# Altium PCB PCB1.PcbDoc (part 4 of 9)
Units mm, origin at the board's own origin, x right, y up, seen from the top; angles counter-clockwise.
Board outline 227 x 102 mm, 4 copper layers (Top Layer, MidLayer1, MidLayer2, Bottom Layer); 425 components, 426 nets, 1455 pads, 440 vias.
Unrouted connection lines stored in the file: 2.
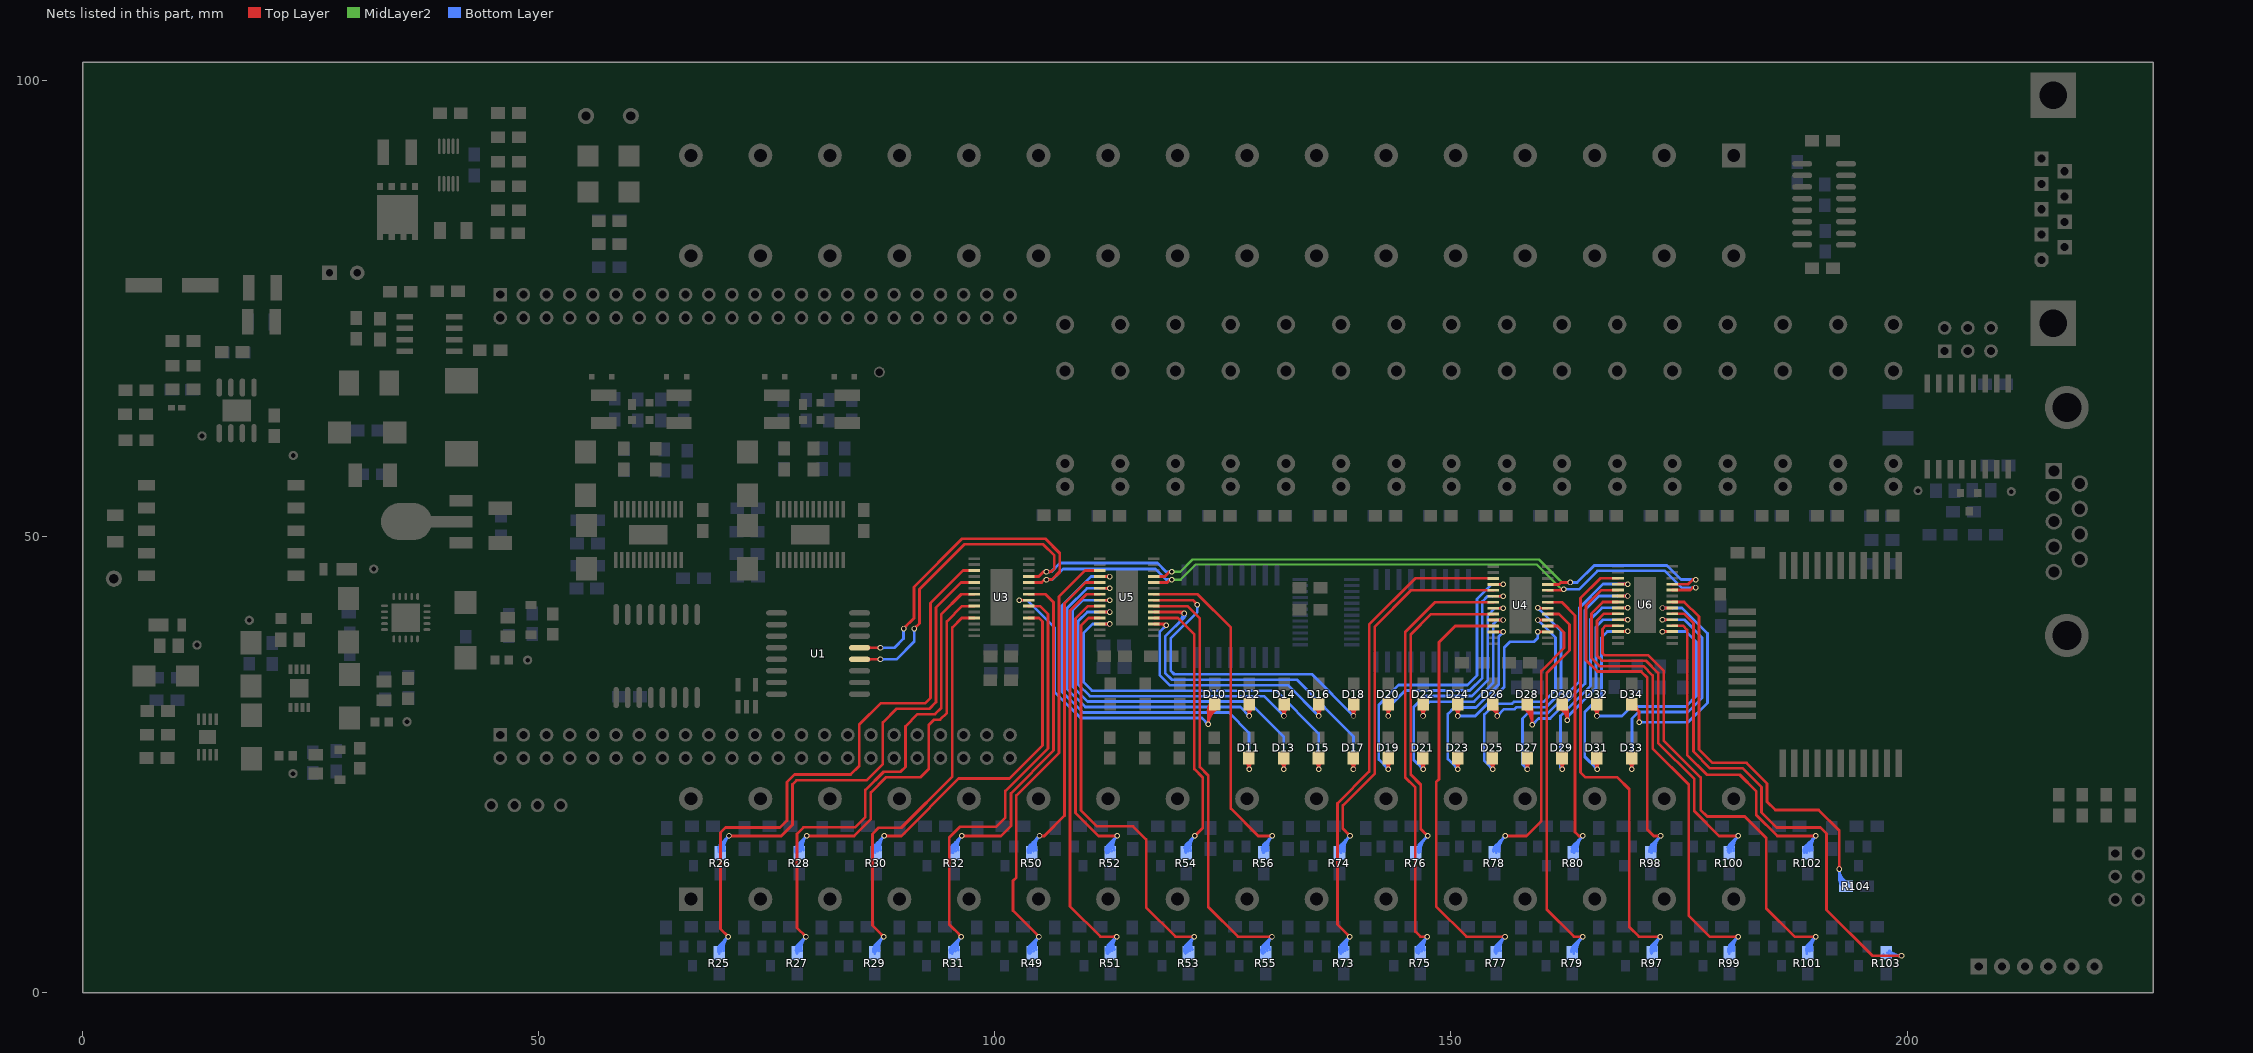
[diagram p6: the nets of this part, all layers, seen from the top]

## Via types
v1: diameter 0.6, hole 0.4, Top Layer to Bottom Layer, 427 vias
v2: diameter 0.5, hole 0.2, Top Layer to Bottom Layer, 9 vias
v3: diameter 0.66, hole 0.33, Top Layer to Bottom Layer, 4 vias

## Nets (pads, with @x,y where several pads share a name; then routed paths per layer and width w, separated by ;. In a path a pad name is that pad's centre, name@x,y a point inside that pad or via, vN(x,y) a via of type N, cw(c..) or ccw(c..) an arc to the next point about the centre after c; other vN are vias at no path point) (continued)
IN_LED7: D10.1 U3.21 | length 44.1
  Top Layer w0.3: v1(102.66,43.06) 102.665,43.055 U3.21@103.702,43.055 ; v1@102.766,42.954 cw(c103.01,42.71) 103.01,43.055 ; v1@102.766,43.166 ccw(c103.034,43.434) 103.034,43.055 ; v1@123.284,29.556 ccw(c123.028,29.812) 123.39,29.812 ccw(c123.752,29.812) v1@123.496,29.556 ; v1@123.39,29.34 cw(c125.647,29.34) D10.1@124.363,31.196 ; v1(123.39,29.45) 123.39,30.963 D10.1@124.087,31.66 ; 123.39,29.912 cw(c125.252,29.912) D10.1@124.193,31.443 ; 123.39,30.484 cw(c124.856,30.484) D10.1@124.022,31.69 ; 123.39,31.056 cw(c124.46,31.056) D10.1@123.851,31.936 ; D10.1@123.603,31.57 cw(c122.762,31.526) 123.358,30.93 cw(c123.85,30.437) D10.1@123.99,31.12
  Bottom Layer w0.3: v1(102.66,43.06) 103.536,43.06 106.55,40.046 106.55,33.01 109.42,30.14 122.7,30.14 v1(123.39,29.45) ; v1@102.766,42.954 cw(c103.022,42.698) 103.022,43.06 cw(c103.022,43.422) v1@102.766,43.166 ; v1@123.24,29.45 ccw(c122.878,29.45) 123.134,29.706 ccw(c123.39,29.962) v1@123.39,29.6
IN_LED8: D11.1 U5.4 | length 48.7
  Top Layer w0.3: U5.4@111.498,45.655 112.595,45.655 v1(112.6,45.65) ; 112.226,45.655 cw(c112.226,45.276) v1@112.494,45.544 ; 112.25,45.655 ccw(c112.25,46) v1@112.494,45.756 ; D11.1@127.521,25.341 cw(c126.773,24.54) v1(127.869,24.54) 127.869,25.744 D11.1@127.852,25.76 ; v1@127.763,24.646 ccw(c127.507,24.902) 127.869,24.902 ccw(c128.231,24.902) v1@127.975,24.646 ; v1@127.869,24.564 cw(c128.984,24.564) D11.1@128.195,25.352
  Bottom Layer w0.3: v1@112.494,45.544 ccw(c112.238,45.288) 112.238,45.65 ccw(c112.238,46.012) v1@112.494,45.756 ; v1(112.6,45.65) 110.56,45.65 107.33,42.42 107.33,33.079 109.669,30.74 125.65,30.74 127.869,28.521 v1(127.869,24.54) ; v1@127.763,24.646 ccw(c127.507,24.902) 127.869,24.902 ccw(c128.231,24.902) v1@127.975,24.646
IN_LED9: D12.1 U5.6 | length 42.1
  Top Layer w0.3: U5.6@111.498,44.355 v1(112.6,44.355) ; v1@112.494,44.249 ccw(c112.238,43.993) 112.238,44.355 ccw(c112.238,44.717) v1@112.494,44.461 ; D12.1@127.554,31.252 cw(c126.771,30.469) v1@127.878,30.469 ; v1@127.772,30.476 ccw(c127.516,30.732) 127.878,30.732 ccw(c128.24,30.732) v1@127.984,30.476 ; v1(127.878,30.37) 127.878,31.641 D12.1@127.897,31.66 ; v1@127.878,30.379 cw(c129.113,30.379) D12.1@128.24,31.252
  Bottom Layer w0.3: v1@112.494,44.249 ccw(c112.238,43.993) 112.238,44.355 ccw(c112.238,44.717) v1@112.494,44.461 ; v1(112.6,44.355) 110.114,44.355 107.93,42.171 107.93,33.327 109.917,31.34 126.908,31.34 v1(127.878,30.37) ; v1@127.728,30.37 ccw(c127.366,30.37) 127.622,30.626 ccw(c127.878,30.882) v1@127.878,30.52
IN_LED10: D13.1 U5.8 | length 48.2
  Top Layer w0.3: U5.8@111.498,43.055 v1(112.6,43.055) ; v1@112.494,42.949 ccw(c112.238,42.693) 112.238,43.055 ccw(c112.238,43.417) v1@112.494,43.161 ; D13.1@131.335,25.34 cw(c130.591,24.54) v1(131.683,24.54) 131.683,25.742 D13.1@131.665,25.76 ; v1@131.577,24.646 ccw(c131.321,24.902) 131.683,24.902 ccw(c132.045,24.902) v1@131.789,24.646 ; v1@131.683,24.568 cw(c132.792,24.568) D13.1@132.008,25.352
  Bottom Layer w0.3: v1@112.494,42.949 ccw(c112.238,42.693) 112.238,43.055 ccw(c112.238,43.417) v1@112.494,43.161 ; v1(112.6,43.055) 109.662,43.055 108.53,41.923 108.53,33.576 110.166,31.94 127.79,31.94 131.683,28.047 v1(131.683,24.54) ; v1@131.577,24.646 ccw(c131.321,24.902) 131.683,24.902 ccw(c132.045,24.902) v1@131.789,24.646
IN_LED11: D14.1 U5.10 | length 41.3
  Top Layer w0.3: U5.10@111.498,41.755 v1(112.6,41.755) ; v1@112.494,41.649 ccw(c112.238,41.393) 112.238,41.755 ccw(c112.238,42.117) v1@112.494,41.861 ; D14.1@131.363,31.252 cw(c130.573,30.462) v1@131.69,30.462 ; v1@131.584,30.476 ccw(c131.328,30.732) 131.69,30.732 ccw(c132.052,30.732) v1@131.796,30.476 ; v1(131.69,30.37) 131.69,31.644 D14.1@131.706,31.66 ; v1@131.69,30.386 cw(c132.915,30.386) D14.1@132.049,31.252
  Bottom Layer w0.3: v1@112.494,41.649 ccw(c112.238,41.393) 112.238,41.755 ccw(c112.238,42.117) v1@112.494,41.861 ; v1(112.6,41.755) 110.135,41.755 109.13,40.75 109.13,33.824 110.414,32.54 129.52,32.54 v1(131.69,30.37) ; v1@131.54,30.37 ccw(c131.178,30.37) 131.434,30.626 ccw(c131.69,30.882) v1@131.69,30.52
IN_LED12: D15.1 U5.12 | length 47.1
  Top Layer w0.3: U5.12@111.498,40.455 v1(112.6,40.455) ; v1@112.494,40.349 ccw(c112.238,40.093) 112.238,40.455 ccw(c112.238,40.817) v1@112.494,40.561 ; D15.1@135.149,25.339 cw(c134.41,24.54) v1(135.498,24.54) 135.498,25.74 D15.1@135.478,25.76 ; v1@135.392,24.646 ccw(c135.136,24.902) 135.498,24.902 ccw(c135.86,24.902) v1@135.604,24.646 ; v1@135.498,24.573 cw(c136.6,24.573) D15.1@135.821,25.352
  Bottom Layer w0.3: v1@112.494,40.349 ccw(c112.238,40.093) 112.238,40.455 ccw(c112.238,40.817) v1@112.494,40.561 ; v1(112.6,40.455) 110.715,40.455 109.73,39.47 109.73,34.073 110.663,33.14 130.81,33.14 135.498,28.452 v1(135.498,24.54) ; v1@135.392,24.646 ccw(c135.136,24.902) 135.498,24.902 ccw(c135.86,24.902) v1@135.604,24.646
IN_LED13: D16.1 U5.17 | length 32
  Top Layer w0.3: U5.17@117.442,40.455 118.625,40.455 v1(118.78,40.3) ; U5.17@118.044,40.455 cw(c118.044,39.564) v1@118.674,40.194 ; D16.1@135.172,31.252 cw(c134.375,30.455) v1@135.502,30.455 ; v1@135.396,30.476 ccw(c135.14,30.732) 135.502,30.732 ccw(c135.864,30.732) v1@135.608,30.476 ; v1(135.502,30.37) 135.502,31.647 D16.1@135.515,31.66 ; v1@135.502,30.393 cw(c136.717,30.393) D16.1@135.858,31.252
  Bottom Layer w0.3: v1@118.63,40.3 cw(c118.268,40.3) 118.524,40.044 cw(c118.78,39.788) v1@118.78,40.15 ; v1(118.78,40.3) 118.07,39.59 118.07,34.839 119.169,33.74 132.132,33.74 v1(135.502,30.37) ; v1@135.352,30.37 ccw(c134.99,30.37) 135.246,30.626 ccw(c135.502,30.882) v1@135.502,30.52
IN_LED14: D17.1 U5.19 | length 44.9
  Top Layer w0.3: U5.19@117.442,41.755 120.605,41.755 v1(120.76,41.6) ; 120.024,41.755 cw(c120.024,40.864) v1@120.654,41.494 ; D17.1@138.962,25.338 cw(c138.228,24.54) v1(139.313,24.54) 139.313,25.738 D17.1@139.291,25.76 ; v1@139.207,24.646 ccw(c138.951,24.902) 139.313,24.902 ccw(c139.675,24.902) v1@139.419,24.646 ; v1@139.313,24.577 cw(c140.409,24.577) D17.1@139.634,25.352
  Bottom Layer w0.3: 120.207,40.627 ccw(c119.234,41.6) v1@120.61,41.6 ; v1@120.654,41.494 cw(c120.398,41.238) 120.76,41.238 cw(c121.122,41.238) v1@120.866,41.494 ; 120.719,41.139 ccw(c120.258,41.6) v1@120.91,41.6 ; v1(120.76,41.6) 120.76,41.18 118.67,39.09 118.67,35.09 119.42,34.34 133.1,34.34 139.313,28.127 v1(139.313,24.54) ; v1@139.207,24.646 ccw(c138.951,24.902) 139.313,24.902 ccw(c139.675,24.902) v1@139.419,24.646
IN_LED15: D18.1 U5.21 | length 40.9
  Top Layer w0.3: U5.21@117.442,43.055 121.705,43.055 v1(122.2,42.56) ; v1@122.05,42.56 ccw(c121.688,42.56) 121.944,42.816 ccw(c122.2,43.072) v1@122.2,42.71 ; D18.1@138.981,31.252 cw(c138.178,30.449) v1@139.314,30.449 ; v1@139.208,30.476 ccw(c138.952,30.732) 139.314,30.732 ccw(c139.676,30.732) v1@139.42,30.476 ; v1(139.314,30.37) 139.314,31.65 D18.1@139.324,31.66 ; v1@139.314,30.4 cw(c140.519,30.4) D18.1@139.667,31.252
  Bottom Layer w0.3: v1@122.094,42.454 cw(c121.838,42.198) 122.2,42.198 cw(c122.562,42.198) v1@122.306,42.454 ; v1(122.2,42.56) 122.2,41.77 119.27,38.84 119.27,35.339 119.669,34.94 134.744,34.94 v1(139.314,30.37) ; v1@139.164,30.37 ccw(c138.802,30.37) 139.058,30.626 ccw(c139.314,30.882) v1@139.314,30.52
IN_LED16: D19.1 U4.4 | length 37.9
  Top Layer w0.3: D19.1@142.776,25.337 cw(c142.047,24.54) v1(143.127,24.54) 143.127,25.736 D19.1@143.103,25.76 ; v1@143.021,24.646 ccw(c142.765,24.902) 143.127,24.902 ccw(c143.489,24.902) v1@143.233,24.646 ; v1@143.127,24.582 cw(c144.217,24.582) D19.1@143.446,25.352 ; U4.4@154.648,44.785 154.653,44.79 v1(155.74,44.79) ; v1@155.634,44.684 ccw(c155.378,44.428) 155.378,44.79 ccw(c155.378,45.152) v1@155.634,44.896
  Bottom Layer w0.3: v1@142.977,24.54 ccw(c142.615,24.54) 142.871,24.796 ccw(c143.127,25.052) v1@143.127,24.69 ; v1(143.127,24.54) 142.09,25.577 142.09,31.6 144.26,33.77 151.81,33.77 152.84,34.8 152.84,43.18 154.45,44.79 v1(155.74,44.79) ; v1@155.634,44.684 ccw(c155.378,44.428) 155.378,44.79 ccw(c155.378,45.152) v1@155.634,44.896
IN_LED17: D20.1 U4.6 | length 30
  Top Layer w0.3: D20.1@142.79,31.252 cw(c141.98,30.442) v1@143.126,30.442 ; v1@143.02,30.476 ccw(c142.764,30.732) 143.126,30.732 ccw(c143.488,30.732) v1@143.232,30.476 ; v1(143.126,30.37) 143.126,31.653 D20.1@143.133,31.66 ; v1@143.126,30.407 cw(c144.322,30.407) D20.1@143.476,31.252 ; U4.6@154.648,43.485 v1(155.74,43.485) ; v1@155.634,43.379 ccw(c155.378,43.123) 155.378,43.485 ccw(c155.378,43.847) v1@155.634,43.591
  Bottom Layer w0.3: v1@143.02,30.476 ccw(c142.764,30.732) 143.126,30.732 ccw(c143.488,30.732) v1@143.232,30.476 ; v1(143.126,30.37) 143.126,31.306 144.99,33.17 152.06,33.17 153.44,34.55 153.44,42.931 153.994,43.485 v1(155.74,43.485) ; v1@155.634,43.379 ccw(c155.378,43.123) 155.378,43.485 ccw(c155.378,43.847) v1@155.634,43.591
IN_LED18: D21.1 U4.8 | length 32.1
  Top Layer w0.3: D21.1@146.59,25.336 cw(c145.865,24.54) v1(146.942,24.54) 146.942,25.734 D21.1@146.916,25.76 ; v1@146.836,24.646 ccw(c146.58,24.902) 146.942,24.902 ccw(c147.304,24.902) v1@147.048,24.646 ; v1@146.942,24.586 cw(c148.025,24.586) D21.1@147.259,25.352 ; U4.8@154.648,42.185 v1(155.74,42.185) ; v1@155.634,42.079 ccw(c155.378,41.823) 155.378,42.185 ccw(c155.378,42.547) v1@155.634,42.291
  Bottom Layer w0.3: v1@146.792,24.54 ccw(c146.43,24.54) 146.686,24.796 ccw(c146.942,25.052) v1@146.942,24.69 ; v1(146.942,24.54) 145.92,25.562 145.92,31.37 147.115,32.565 152.305,32.565 154.04,34.3 154.04,41.4 154.825,42.185 v1(155.74,42.185) ; v1@155.634,42.079 ccw(c155.378,41.823) 155.378,42.185 ccw(c155.378,42.547) v1@155.634,42.291
IN_LED19: D22.1 U4.10 | length 24.3
  Top Layer w0.3: D22.1@146.599,31.252 cw(c145.782,30.435) v1@146.938,30.435 ; v1@146.832,30.476 ccw(c146.576,30.732) 146.938,30.732 ccw(c147.3,30.732) v1@147.044,30.476 ; v1(146.938,30.37) 146.938,31.656 D22.1@146.942,31.66 ; v1@146.938,30.413 cw(c148.124,30.413) D22.1@147.285,31.252 ; U4.10@154.23,40.89 154.235,40.885 v1(155.74,40.885) ; v1@155.634,40.779 ccw(c155.378,40.523) 155.378,40.885 ccw(c155.378,41.247) v1@155.634,40.991
  Bottom Layer w0.3: v1@146.832,30.476 ccw(c146.576,30.732) 146.938,30.732 ccw(c147.3,30.732) v1@147.044,30.476 ; v1(146.938,30.37) 146.938,31.178 147.69,31.93 152.52,31.93 154.64,34.05 154.64,40.44 155.085,40.885 v1(155.74,40.885) ; v1@155.634,40.779 ccw(c155.378,40.523) 155.378,40.885 ccw(c155.378,41.247) v1@155.634,40.991
IN_LED20: D23.1 U4.12 | length 25.7
  Top Layer w0.3: D23.1@150.404,25.335 cw(c149.683,24.54) v1(150.757,24.54) 150.757,25.732 D23.1@150.729,25.76 ; v1@150.651,24.646 ccw(c150.395,24.902) 150.757,24.902 ccw(c151.119,24.902) v1@150.863,24.646 ; v1@150.757,24.591 cw(c151.834,24.591) D23.1@151.072,25.352 ; U4.12@154.648,39.585 v1(155.74,39.585) ; v1@155.634,39.479 ccw(c155.378,39.223) 155.378,39.585 ccw(c155.378,39.947) v1@155.634,39.691
  Bottom Layer w0.3: v1@150.607,24.54 ccw(c150.245,24.54) 150.501,24.796 ccw(c150.757,25.052) v1@150.757,24.69 ; v1(150.757,24.54) 149.66,25.637 149.66,30.59 150.36,31.29 152.73,31.29 155.24,33.8 155.24,39.085 v1(155.74,39.585) ; v1@155.59,39.585 cw(c155.228,39.585) 155.484,39.329 cw(c155.74,39.073) v1@155.74,39.435
IN_LED21: D24.1 U4.17 | length 22
  Top Layer w0.3: D24.1@150.409,31.252 cw(c149.585,30.428) v1@150.75,30.428 ; v1@150.644,30.476 ccw(c150.388,30.732) 150.75,30.732 ccw(c151.112,30.732) v1@150.856,30.476 ; v1(150.75,30.37) 150.75,31.658 D24.1@150.752,31.66 ; v1@150.75,30.42 cw(c151.926,30.42) D24.1@151.095,31.252 ; v1(159.52,39.585) U4.17@160.592,39.585 ; v1@159.626,39.479 cw(c159.882,39.223) 159.882,39.585 cw(c159.882,39.947) v1@159.626,39.691
  Bottom Layer w0.3: v1(150.75,30.37) 152.66,30.37 155.84,33.55 155.84,37.86 156.48,38.5 159.08,38.5 159.52,38.94 v1(159.52,39.585) ; v1@150.856,30.264 cw(c151.112,30.008) 151.112,30.37 cw(c151.112,30.732) v1@150.856,30.476 ; v1@159.414,39.479 cw(c159.158,39.223) 159.52,39.223 cw(c159.882,39.223) v1@159.626,39.479
IN_LED22: D25.1 U4.19 | length 30
  Top Layer w0.3: D25.1@154.217,25.335 cw(c153.502,24.54) v1(154.571,24.54) 154.571,25.731 D25.1@154.542,25.76 ; v1@154.465,24.646 ccw(c154.209,24.902) 154.571,24.902 ccw(c154.933,24.902) v1@154.677,24.646 ; v1@154.571,24.595 cw(c155.642,24.595) D25.1@154.885,25.352 ; v1(159.52,40.885) U4.19@160.592,40.885 ; v1@159.626,40.779 cw(c159.882,40.523) 159.882,40.885 cw(c159.882,41.247) v1@159.626,40.991
  Bottom Layer w0.3: v1@154.421,24.54 ccw(c154.059,24.54) 154.315,24.796 ccw(c154.571,25.052) v1@154.571,24.69 ; v1(154.571,24.54) 153.66,25.451 153.66,30.518 154.852,31.71 156.7,31.71 156.9,31.91 160.14,31.91 161.45,33.22 161.45,38.955 v1(159.52,40.885) ; v1@159.52,40.735 cw(c159.52,40.373) 159.776,40.629 cw(c160.032,40.885) v1@159.67,40.885
IN_LED23: D26.1 U4.21 | length 26
  Top Layer w0.3: D26.1@154.428,31.129 cw(c154.182,30.265) v1@155.08,30.265 ; D26.1@154.51,31.417 cw(c154.295,30.662) v1@155.08,30.662 ; D26.1@154.561,31.66 155.08,31.141 v1(155.08,30.37) ; D26.1@154.592,31.706 cw(c154.408,31.059) D26.1@155.08,31.059 ; v1@154.974,30.476 ccw(c154.718,30.732) 155.08,30.732 ccw(c155.442,30.732) v1@155.186,30.476 ; v1(159.52,42.21) 159.55,42.18 160.587,42.18 U4.21@160.592,42.185 ; v1@159.626,42.316 ccw(c159.955,42.645) 159.955,42.18
  Bottom Layer w0.3: v1(155.08,30.37) 155.82,31.11 156.95,31.11 157.15,31.31 160.39,31.31 162.05,32.97 162.05,39.68 v1(159.52,42.21) ; v1@155.08,30.52 ccw(c155.08,30.882) 155.336,30.626 ccw(c155.592,30.37) v1@155.23,30.37 ; v1@159.52,42.06 cw(c159.52,41.698) 159.776,41.954 cw(c160.032,42.21) v1@159.67,42.21
IN_LED24: D27.1 U6.4 | length 34.4
  Top Layer w0.3: D27.1@158.029,25.335 cw(c157.316,24.546) 158.38,24.546 158.38,25.735 D27.1@158.355,25.76 ; v1@158.28,24.646 ccw(c158.038,24.888) 158.38,24.888 ; v1@158.38,24.585 cw(c159.465,24.585) D27.1@158.698,25.352 ; 158.38,24.917 ccw(c158.763,24.917) v1@158.492,24.646 ; U6.4@168.308,44.815 168.313,44.82 v1(169.37,44.82) ; v1@169.264,44.714 ccw(c169.008,44.458) 169.008,44.82 ccw(c169.008,45.182) v1@169.264,44.926
  Bottom Layer w0.3: v1@158.236,24.54 ccw(c157.874,24.54) 158.13,24.796 ccw(c158.386,25.052) v1@158.386,24.69 ; v1(158.386,24.54) 157.85,25.076 157.85,30.08 158.46,30.69 160.62,30.69 164.09,34.16 164.09,42.23 166.68,44.82 v1(169.37,44.82) ; v1@169.264,44.714 ccw(c169.008,44.458) 169.008,44.82 ccw(c169.008,45.182) v1@169.264,44.926
IN_LED25: D28.1 U6.6 | length 31.8
  Top Layer w0.3: D28.1@158.052,31.229 cw(c156.412,29.344) v1@158.91,29.344 ; D28.1@158.248,31.455 cw(c156.985,30.003) 158.91,30.003 ; D28.1@158.37,31.66 158.91,31.12 v1(158.91,29.41) ; D28.1@158.445,31.682 cw(c157.558,30.662) 158.91,30.662 ; v1@158.804,29.516 ccw(c158.548,29.772) 158.91,29.772 ccw(c159.272,29.772) v1@159.016,29.516 ; U6.6@168.308,43.515 v1(169.37,43.515) ; v1@169.264,43.409 ccw(c169.008,43.153) 169.008,43.515 ccw(c169.008,43.877) v1@169.264,43.621
  Bottom Layer w0.3: v1@158.91,29.39 159.61,30.09 160.87,30.09 164.69,33.91 164.69,41.97 166.235,43.515 v1(169.37,43.515) ; v1@158.91,29.56 ccw(c158.91,29.97) 159.2,29.68 ; v1@159.06,29.41 cw(c159.374,29.41) 159.152,29.632 ; v1@169.264,43.409 ccw(c169.008,43.153) 169.008,43.515 ccw(c169.008,43.877) v1@169.264,43.621
IN_LED26: D29.1 U6.8 | length 29
  Top Layer w0.3: D29.1@161.845,25.333 cw(c161.138,24.54) v1(162.201,24.54) 162.201,25.727 D29.1@162.168,25.76 ; v1@162.095,24.646 ccw(c161.839,24.902) 162.201,24.902 ccw(c162.563,24.902) v1@162.307,24.646 ; v1@162.201,24.604 cw(c163.259,24.604) D29.1@162.51,25.352 ; U6.8@168.308,42.215 v1(169.37,42.215) ; v1@169.264,42.109 ccw(c169.008,41.853) 169.008,42.215 ccw(c169.008,42.577) v1@169.264,42.321
  Bottom Layer w0.3: 162.01,25.362 ccw(c163.023,25.362) v1@162.307,24.646 ; v1(162.201,24.54) 162.01,24.731 162.01,30.38 165.29,33.66 165.29,40.97 166.535,42.215 v1(169.37,42.215) ; v1@169.264,42.109 ccw(c169.008,41.853) 169.008,42.215 ccw(c169.008,42.577) v1@169.264,42.321
IN_LED27: D30.1 U6.10 | length 24.8
  Top Layer w0.3: D30.1@161.947,31.169 cw(c161.188,29.781) v1@162.77,29.781 ; D30.1@162.09,31.433 cw(c161.464,30.287) 162.77,30.287 ; D30.1@162.179,31.66 162.77,31.069 v1@162.77,29.88 ; D30.1@162.234,31.696 cw(c161.741,30.793) 162.77,30.793 ; v1@162.654,29.986 ccw(c162.374,30.266) 162.77,30.266 ; 162.77,30.218 ccw(c163.098,30.218) v1@162.866,29.986 ; U6.10@168.308,40.915 v1(169.37,40.915) ; v1@169.264,40.809 ccw(c169.008,40.553) 169.008,40.915 ccw(c169.008,41.277) v1@169.264,41.021
  Bottom Layer w0.3: v1@162.661,29.992 ccw(c162.358,30.335) 162.815,30.335 ; v1@162.815,29.825 162.815,30.335 ; v1@169.264,40.809 ccw(c169.008,40.553) 169.008,40.915 ccw(c169.008,41.277) v1@169.264,41.021 ; v1(169.37,40.915) 166.675,40.915 165.89,40.13 165.89,33.41 162.815,30.335
  other v1: 162.76,29.88
IN_LED28: D31.1 U6.12 | length 24.9
  Top Layer w0.3: D31.1@165.659,25.332 cw(c164.956,24.54) v1(166.015,24.54) 166.015,25.725 D31.1@165.98,25.76 ; v1@165.909,24.646 ccw(c165.653,24.902) 166.015,24.902 ccw(c166.377,24.902) v1@166.121,24.646 ; v1@166.015,24.609 cw(c167.067,24.609) D31.1@166.323,25.352 ; U6.12@168.308,39.615 v1@169.37,39.615 ; U6.12@168.899,39.615 ccw(c168.899,40.131) v1@169.264,39.766
  Bottom Layer w0.3: v1@165.865,24.54 ccw(c165.503,24.54) 165.759,24.796 ccw(c166.015,25.052) v1@166.015,24.69 ; v1(166.015,24.54) 164.66,25.895 164.66,30.81 166.49,32.64 166.49,38.97 167.135,39.615 v1@169.37,39.615 ; 168.899,39.615 ccw(c168.899,40.131) v1@169.264,39.766
  other v1: 169.37,39.66
IN_LED29: D32.1 U6.17 | length 28.6
  Top Layer w0.3: D32.1@165.645,31.252 cw(c164.794,30.401) v1@165.998,30.401 ; v1@165.892,30.476 ccw(c165.636,30.732) 165.998,30.732 ccw(c166.36,30.732) v1@166.104,30.476 ; D32.1@165.988,31.66 165.998,31.65 v1(165.998,30.37) ; v1@165.998,30.448 cw(c167.136,30.448) D32.1@166.331,31.252 ; v1(173.18,39.615) 174.455,39.615 U6.17@174.46,39.62 ; v1@173.286,39.509 cw(c173.542,39.253) 173.542,39.615 cw(c173.542,39.977) v1@173.286,39.721
  Bottom Layer w0.3: v1(165.998,30.37) 168.73,30.37 169.77,31.41 175.74,31.41 176.91,32.58 176.91,38.46 175.755,39.615 v1(173.18,39.615) ; v1@166.104,30.264 cw(c166.36,30.008) 166.36,30.37 cw(c166.36,30.732) v1@166.104,30.476 ; v1@173.286,39.509 cw(c173.542,39.253) 173.542,39.615 cw(c173.542,39.977) v1@173.286,39.721
IN_LED30: D33.1 U6.19 | length 32.2
  Top Layer w0.3: D33.1@169.472,25.331 cw(c168.775,24.539) v1(169.83,24.54) 169.83,25.723 D33.1@169.793,25.76 ; v1@169.724,24.646 ccw(c169.468,24.902) 169.83,24.902 ccw(c170.192,24.902) v1@169.936,24.646 ; v1@169.83,24.613 cw(c170.875,24.613) D33.1@170.136,25.352 ; v1(173.18,40.915) U6.19@174.252,40.915 ; v1@173.286,40.809 cw(c173.542,40.553) 173.542,40.915 cw(c173.542,41.277) v1@173.286,41.021
  Bottom Layer w0.3: v1@169.724,24.646 ccw(c169.468,24.902) 169.83,24.902 ccw(c170.192,24.902) v1@169.936,24.646 ; v1(169.83,24.54) 169.83,30.07 170.57,30.81 175.99,30.81 177.51,32.33 177.51,38.98 175.575,40.915 v1(173.18,40.915) ; v1@173.286,40.809 cw(c173.542,40.553) 173.542,40.915 cw(c173.542,41.277) v1@173.286,41.021
IN_LED31: D34.1 U6.21 | length 29.4
  Top Layer w0.3: D34.1@169.797,31.66 170.62,30.837 v1(170.62,29.69) ; D34.1@169.832,31.111 cw(c169.907,30.059) 170.652,30.805 ; D34.1@170.282,31.595 ccw(c171.296,31.595) 170.579,30.878 ; v1@170.514,29.796 ccw(c170.258,30.052) 170.62,30.052 ccw(c170.982,30.052) v1@170.726,29.796 ; v1(173.18,42.2) 174.237,42.2 U6.21@174.252,42.215 ; v1@173.286,42.094 cw(c173.542,41.838) 173.542,42.2 cw(c173.542,42.562) v1@173.286,42.306
  Bottom Layer w0.3: v1(170.62,29.69) 176.01,29.69 178.11,31.79 178.11,39.42 175.33,42.2 v1(173.18,42.2) ; v1@170.726,29.584 cw(c170.982,29.328) 170.982,29.69 cw(c170.982,30.052) v1@170.726,29.796 ; v1@173.286,42.094 cw(c173.542,41.838) 173.542,42.2 cw(c173.542,42.562) v1@173.286,42.306
IN_SIG0: R25.2 U3.3 | length 70
  Top Layer w0.3: v1@70.63,6.17 ccw(c70.268,6.17) 70.524,6.426 ccw(c70.78,6.682) v1@70.78,6.32 ; v1(70.78,6.17) 69.93,7.02 69.93,17.59 70.481,18.141 76.461,18.141 77.21,18.89 77.21,23.13 78.03,23.95 84.2,23.95 85.14,24.89 85.14,29.41 87.5,31.77 92.38,31.77 92.94,32.33 92.94,42.74 96.505,46.305 U3.3@97.758,46.305
  Bottom Layer w0.3: R25.2@69.686,4.525 cw(c70.616,4.675) 69.95,5.34 ; R25.2@69.8,4.326 69.8,5.19 v1(70.78,6.17) ccw(c72.045,4.905) R25.2@70.279,4.62 ; R25.2@69.983,4.572 cw(c71.33,4.79) 70.365,5.755 ; v1@70.63,6.17 cw(c70.268,6.17) 70.524,5.914 cw(c70.78,5.658) v1@70.78,6.02
IN_SIG1: R26.2 U3.5 | length 58
  Top Layer w0.3: v1(70.86,17.22) 76.59,17.22 77.81,18.44 77.81,22.87 78.25,23.31 85.94,23.31 87.72,25.09 87.72,29.64 89.24,31.16 92.82,31.16 93.54,31.88 93.54,42.24 96.305,45.005 U3.5@97.758,45.005 ; v1@70.966,17.114 cw(c71.222,16.858) 71.222,17.22 cw(c71.222,17.582) v1@70.966,17.326
  Bottom Layer w0.3: R26.2@69.688,15.948 ccw(c69.563,16.24) 69.88,16.24 ; R26.2@69.767,15.482 cw(c70.797,15.675) 70.056,16.416 ; R26.2@69.88,15.376 69.88,16.24 ; R26.2@70.062,15.537 cw(c71.474,15.802) 70.458,16.818 ; R26.2@70.072,15.948 cw(c70.197,16.24) 69.88,16.24 ; R26.2@70.357,15.592 cw(c72.151,15.929) v1(70.86,17.22) 69.88,16.24 ; v1@70.71,17.22 cw(c70.348,17.22) 70.604,16.964 cw(c70.86,16.708) v1@70.86,17.07
IN_SIG2: R27.2 U3.7 | length 59.6
  Top Layer w0.3: v1@79.145,6.17 ccw(c78.783,6.17) 79.039,6.426 ccw(c79.295,6.682) v1@79.295,6.32 ; v1(79.295,6.17) 78.32,7.145 78.32,17.45 79.03,18.16 84.67,18.16 85.81,19.3 85.81,22.24 87.82,24.25 89.67,24.25 90.21,24.79 90.21,29.23 91.54,30.56 93.43,30.56 94.14,31.27 94.14,41.53 96.315,43.705 U3.7@97.758,43.705
  Bottom Layer w0.3: R27.2@78.227,4.522 cw(c79.157,4.694) 78.488,5.364 ; R27.2@78.315,4.326 78.315,5.19 v1(79.295,6.17) ccw(c80.518,4.947) R27.2@78.817,4.631 ; R27.2@78.522,4.577 cw(c79.838,4.821) 78.891,5.767 ; v1@79.145,6.17 cw(c78.783,6.17) 79.039,5.914 cw(c79.295,5.658) v1@79.295,6.02
IN_SIG3: R28.2 U3.9 | length 48.6
  Top Layer w0.3: v1(79.369,17.22) 84.58,17.22 86.41,19.05 86.41,21.99 88.07,23.65 91.85,23.65 92.76,24.56 92.76,29.36 93.36,29.96 93.99,29.96 94.74,30.71 94.74,40.73 96.415,42.405 U3.9@97.758,42.405 ; v1@79.475,17.114 cw(c79.731,16.858) 79.731,17.22 cw(c79.731,17.582) v1@79.475,17.326
  Bottom Layer w0.3: R28.2@78.169,15.365 cw(c78.936,15.636) 78.36,16.211 ; R28.2@78.224,15.853 ccw(c77.853,16.24) 78.389,16.24 ; R28.2@78.389,15.376 78.389,16.24 ; R28.2@78.452,15.465 cw(c79.432,15.812) 78.697,16.547 ; R28.2@78.616,15.985 cw(c78.646,16.24) 78.389,16.24 ; R28.2@78.734,15.565 cw(c79.929,15.988) 79.033,16.884 ; R28.2@79.017,15.665 cw(c80.426,16.163) v1(79.369,17.22) 78.389,16.24 ; v1@79.219,17.22 cw(c78.857,17.22) 79.113,16.964 cw(c79.369,16.708) v1@79.369,17.07
IN_SIG4: R29.2 U3.11 | length 49.6
  Top Layer w0.3: v1@87.659,6.17 ccw(c87.297,6.17) 87.553,6.426 ccw(c87.809,6.682) v1@87.809,6.32 ; v1(87.809,6.17) 86.58,7.399 86.58,17.44 87.25,18.11 89.74,18.11 95.34,23.71 95.34,40.07 96.375,41.105 U3.11@97.758,41.105
  Bottom Layer w0.3: R29.2@86.706,4.526 cw(c87.635,4.667) 86.971,5.331 ; R29.2@86.829,4.326 86.829,5.19 v1(87.809,6.17) ccw(c89.09,4.889) R29.2@87.299,4.616 ; R29.2@87.003,4.571 cw(c88.362,4.778) 87.39,5.751 ; v1@87.659,6.17 cw(c87.297,6.17) 87.553,5.914 cw(c87.809,5.658) v1@87.809,6.02
IN_SIG5: R30.2 U3.18 | length 45.9
  Top Layer w0.3: v1(87.879,17.22) 89.75,17.22 96.03,23.5 101.6,23.5 105.23,27.13 105.23,40.72 104.845,41.105 U3.18@103.702,41.105 ; v1@87.985,17.114 cw(c88.241,16.858) 88.241,17.22 cw(c88.241,17.582) v1@87.985,17.326
  Bottom Layer w0.3: R30.2@86.601,15.39 cw(c87.334,15.598) R30.2@86.795,16.136 ; R30.2@86.722,15.9 ccw(c86.484,16.24) 86.899,16.24 ; R30.2@86.889,15.472 cw(c87.896,15.757) 87.156,16.497 ; R30.2@86.899,15.376 86.899,16.24 ; R30.2@87.109,15.976 cw(c87.17,16.24) 86.899,16.24 ; R30.2@87.178,15.554 cw(c88.459,15.917) 87.517,16.859 ; R30.2@87.467,15.635 cw(c89.022,16.077) v1(87.879,17.22) 86.899,16.24 ; v1@87.729,17.22 cw(c87.367,17.22) 87.623,16.964 cw(c87.879,16.708) v1@87.879,17.07
IN_SIG6: R31.2 U3.20 | length 53.4
  Top Layer w0.3: v1@96.174,6.17 ccw(c95.812,6.17) 96.068,6.426 ccw(c96.324,6.682) v1@96.324,6.32 ; v1(96.324,6.17) 95,7.494 95,17.06 96.15,18.21 100.12,18.21 101.15,19.24 101.15,22.13 105.83,26.81 105.83,38.031 ; U3.20@103.702,42.405 104.965,42.405 105.831,41.539 105.831,38.031
  Bottom Layer w0.3: R31.2@95.127,4.41 cw(c95.804,4.639) R31.2@95.299,5.145 ; R31.2@95.344,4.326 95.344,5.19 v1(96.324,6.17) ccw(c97.337,5.157) R31.2@95.98,4.698 ; R31.2@95.411,4.506 cw(c96.315,4.812) 95.64,5.486 ; R31.2@95.695,4.602 cw(c96.826,4.984) 95.982,5.828 ; v1@96.174,6.17 cw(c95.812,6.17) 96.068,5.914 cw(c96.324,5.658) v1@96.324,6.02
IN_SIG7: R32.2 U3.22 | length 44.6
  Top Layer w0.3: v1(96.388,17.22) 100.67,17.22 101.76,18.31 101.76,21.89 106.44,26.57 106.44,42.83 105.565,43.705 U3.22@103.702,43.705 ; v1@96.494,17.114 cw(c96.75,16.858) 96.75,17.22 cw(c96.75,17.582) v1@96.494,17.326
  Bottom Layer w0.3: R32.2@95.133,15.382 cw(c95.878,15.609) 95.327,16.159 ; R32.2@95.234,15.887 ccw(c94.963,16.24) 95.408,16.24 ; R32.2@95.408,15.376 95.408,16.24 ; R32.2@95.42,15.47 cw(c96.42,15.774) 95.681,16.513 ; R32.2@95.623,15.979 cw(c95.674,16.24) 95.408,16.24 ; R32.2@95.707,15.557 cw(c96.962,15.939) 96.034,16.866 ; R32.2@95.994,15.644 cw(c97.504,16.104) v1(96.388,17.22) 95.408,16.24 ; v1@96.238,17.22 cw(c95.876,17.22) 96.132,16.964 cw(c96.388,16.708) v1@96.388,17.07
IN_SIG8: R49.2 U5.3 | length 54.5
  Top Layer w0.3: v1@104.689,6.17 ccw(c104.327,6.17) 104.583,6.426 ccw(c104.839,6.682) v1@104.839,6.32 ; v1(104.839,6.17) 101.98,9.029 101.98,12.3 102.36,12.68 102.36,21.64 107.04,26.32 107.04,43.45 109.895,46.305 U5.3@111.498,46.305
  Bottom Layer w0.3: R49.2@103.716,4.386 cw(c104.421,4.675) 103.882,5.214 ; R49.2@103.859,4.326 103.859,5.19 v1(104.839,6.17) ccw(c105.778,5.231) R49.2@104.549,4.727 ; R49.2@103.994,4.499 cw(c104.874,4.86) 104.201,5.532 ; R49.2@104.271,4.613 cw(c105.326,5.045) 104.52,5.851 ; v1@104.689,6.17 cw(c104.327,6.17) 104.583,5.914 cw(c104.839,5.658) v1@104.839,6.02
IN_SIG9: R50.2 U5.5 | length 41.1
  Top Layer w0.3: v1(104.897,17.22) 105.42,17.22 107.64,19.44 107.64,42.71 109.935,45.005 U5.5@111.498,45.005 ; v1@105.003,17.114 cw(c105.259,16.858) 105.259,17.22 cw(c105.259,17.582) v1@105.003,17.326
  Bottom Layer w0.3: R50.2@103.665,15.375 cw(c104.42,15.62) 103.859,16.182 ; R50.2@103.747,15.874 ccw(c103.438,16.24) 103.917,16.24 ; R50.2@103.917,15.376 103.917,16.24 ; R50.2@103.951,15.467 cw(c104.943,15.79) 104.205,16.528 ; R50.2@104.137,15.982 cw(c104.179,16.24) 103.917,16.24 ; R50.2@104.236,15.56 cw(c105.465,15.96) 104.551,16.874 ; R50.2@104.521,15.653 cw(c105.988,16.13) v1(104.897,17.22) 103.917,16.24 ; v1@104.747,17.22 cw(c104.385,17.22) 104.641,16.964 cw(c104.897,16.708) v1@104.897,17.07
IN_SIG10: R51.2 U5.7 | length 51.3
  Top Layer w0.3: U5.7@111.498,43.705 110.045,43.705 108.24,41.9 108.24,9.5 111.57,6.17 v1(113.353,6.17) ; v1@113.247,6.064 ccw(c112.991,5.808) 112.991,6.17 ccw(c112.991,6.532) v1@113.247,6.276
  Bottom Layer w0.3: R51.2@112.307,4.361 cw(c113.026,4.711) 112.46,5.277 ; R51.2@112.373,4.326 112.373,5.19 v1(113.353,6.17) ccw(c114.227,5.296) R51.2@113.116,4.755 ; R51.2@112.577,4.493 cw(c113.426,4.906) 112.758,5.575 ; R51.2@112.846,4.624 cw(c113.827,5.101) 113.056,5.872 ; v1@113.203,6.17 cw(c112.841,6.17) 113.097,5.914 cw(c113.353,5.658) v1@113.353,6.02
IN_SIG11: R52.2 U5.9 | length 39.5
  Top Layer w0.3: U5.9@111.498,42.405 110.215,42.405 108.84,41.03 108.84,19.75 111.37,17.22 v1(113.407,17.22) ; v1@113.301,17.114 ccw(c113.045,16.858) 113.045,17.22 ccw(c113.045,17.582) v1@113.301,17.326
  Bottom Layer w0.3: R52.2@112.243,15.353 cw(c113.02,15.655) 112.431,16.244 ; R52.2@112.287,15.846 ccw(c111.95,16.183) 112.427,16.183 ; R52.2@112.427,15.376 112.427,16.24 ; R52.2@112.523,15.461 cw(c113.489,15.837) 112.756,16.569 ; R52.2@112.663,15.987 cw(c112.68,16.24) 112.427,16.24 ; R52.2@112.802,15.57 cw(c113.958,16.019) 113.081,16.895 ; R52.2@113.082,15.679 cw(c114.426,16.2) v1(113.407,17.22) 112.427,16.24 ; v1@113.257,17.22 cw(c112.895,17.22) 113.151,16.964 cw(c113.407,16.708) v1@113.407,17.07
IN_SIG12: R53.2 U5.11 | length 53.7
  Top Layer w0.3: U5.11@111.498,41.105 110.285,41.105 109.44,40.26 109.44,20.01 111.18,18.27 115.16,18.27 116.59,16.84 116.59,9.37 119.79,6.17 v1(121.868,6.17) ; v1@121.762,6.064 ccw(c121.506,5.808) 121.506,6.17 ccw(c121.506,6.532) v1@121.762,6.276
  Bottom Layer w0.3: R53.2@120.863,4.348 cw(c121.585,4.732) 121.007,5.309 ; R53.2@120.888,4.326 120.888,5.19 v1(121.868,6.17) ccw(c122.709,5.328) R53.2@121.658,4.77 ; R53.2@121.128,4.489 cw(c121.96,4.931) 121.294,5.596 ; R53.2@121.393,4.63 cw(c122.335,5.13) 121.581,5.883 ; v1@121.718,6.17 cw(c121.356,6.17) 121.612,5.914 cw(c121.868,5.658) v1@121.868,6.02
IN_SIG13: R54.2 U5.18 | length 36.4
  Top Layer w0.3: U5.18@117.442,41.105 120.065,41.105 121.87,39.3 121.87,24.531 122.79,23.611 122.79,18.094 v1(121.916,17.22) ; v1@121.916,17.37 ccw(c121.916,17.732) 122.172,17.476 ccw(c122.428,17.22) v1@122.066,17.22
  Bottom Layer w0.3: R54.2@120.754,15.921 ccw(c120.565,16.24) 120.936,16.24 ; R54.2@120.888,15.475 cw(c121.906,15.727) 121.165,16.469 ; R54.2@120.936,15.376 120.936,16.24 ; R54.2@121.139,15.968 cw(c121.22,16.24) 120.936,16.24 ; R54.2@121.18,15.547 cw(c122.508,15.877) 121.54,16.844 ; R54.2@121.471,15.62 cw(c123.11,16.026) v1(121.916,17.22) 120.936,16.24 ; v1@121.766,17.22 cw(c121.404,17.22) 121.66,16.964 cw(c121.916,16.708) v1@121.916,17.07
IN_SIG14: R55.2 U5.20 | length 54.3
  Top Layer w0.3: U5.20@117.442,42.405 121.135,42.405 122.47,41.07 122.47,24.78 123.39,23.86 123.39,9.44 126.66,6.17 v1(130.383,6.17) ; v1@130.277,6.064 ccw(c130.021,5.808) 130.021,6.17 ccw(c130.021,6.532) v1@130.277,6.276
  Bottom Layer w0.3: R55.2@129.313,4.368 cw(c130.03,4.701) 129.472,5.259 ; R55.2@129.403,4.326 129.403,5.19 v1(130.383,6.17) ccw(c131.275,5.278) R55.2@130.13,4.747 ; R55.2@129.586,4.495 cw(c130.445,4.893) 129.775,5.563 ; R55.2@129.858,4.621 cw(c130.86,5.085) 130.079,5.866 ; v1@130.233,6.17 cw(c129.871,6.17) 130.127,5.914 cw(c130.383,5.658) v1@130.383,6.02
IN_SIG15: R56.2 U5.22 | length 43.9
  Top Layer w0.3: U5.22@117.442,43.705 117.447,43.7 122.24,43.7 125.866,40.074 125.866,20.224 128.87,17.22 v1(130.425,17.22) ; v1@130.319,17.114 ccw(c130.063,16.858) 130.063,17.22 ccw(c130.063,17.582) v1@130.319,17.326
  Bottom Layer w0.3: R56.2@129.259,15.935 ccw(c129.102,16.24) 129.445,16.24 ; R56.2@129.368,15.478 cw(c130.392,15.704) 129.65,16.445 ; R56.2@129.445,15.376 129.445,16.24 ; R56.2@129.643,15.96 cw(c129.743,16.24) 129.445,16.24 ; R56.2@129.661,15.543 cw(c131.027,15.843) 130.038,16.833 ; R56.2@129.954,15.607 cw(c131.662,15.983) v1(130.425,17.22) 129.445,16.24 ; v1@130.275,17.22 cw(c129.913,17.22) 130.169,16.964 cw(c130.425,16.708) v1@130.425,17.07
IN_SIG16: R73.2 U4.3 | length 60.4
  Top Layer w0.3: v1@138.747,6.17 ccw(c138.385,6.17) 138.641,6.426 ccw(c138.897,6.682) v1@138.897,6.32 ; v1(138.897,6.17) 137.55,7.517 137.55,20.79 141.03,24.27 141.03,40.398 146.082,45.45 U4.3@154.648,45.45
  Bottom Layer w0.3: R73.2@137.858,4.359 cw(c138.578,4.715) 138.01,5.283 ; R73.2@137.917,4.326 137.917,5.19 v1(138.897,6.17) ccw(c139.765,5.302) R73.2@138.665,4.758 ; R73.2@138.127,4.492 cw(c138.974,4.911) 138.306,5.578 ; R73.2@138.396,4.625 cw(c139.37,5.106) 138.602,5.874 ; v1@138.747,6.17 cw(c138.385,6.17) 138.641,5.914 cw(c138.897,5.658) v1@138.897,6.02
IN_SIG17: R74.2 U4.5 | length 47.6
  Top Layer w0.3: v1@138.785,17.22 ccw(c138.423,17.22) 138.679,17.476 ccw(c138.935,17.732) v1@138.935,17.37 ; v1(138.935,17.22) 138.15,18.005 138.15,20.54 141.63,24.02 141.63,40.14 145.64,44.15 U4.5@154.648,44.15
  Bottom Layer w0.3: R74.2@137.665,15.499 cw(c138.669,15.534) 137.959,16.244 ; R74.2@137.726,15.985 ccw(c137.698,16.24) 137.955,16.24 ; R74.2@137.955,15.376 137.955,16.24 ; R74.2@137.965,15.509 cw(c139.612,15.567) 138.447,16.732 ; R74.2@138.119,15.85 cw(c138.5,16.24) 137.955,16.24 ; R74.2@138.265,15.52 cw(c140.555,15.599) v1(138.935,17.22) ; v1@138.785,17.22 cw(c138.423,17.22) 138.679,16.964 cw(c138.935,16.708) v1@138.935,17.07 ; v1(138.935,17.22) 137.955,16.24
IN_SIG18: R75.2 U4.7 | length 54.1
  Top Layer w0.3: v1@147.306,6.064 ccw(c147.05,5.808) 147.05,6.17 ccw(c147.05,6.532) v1@147.306,6.276 ; v1(147.412,6.17) 146.64,6.17 146.09,6.72 146.09,22.53 144.99,23.63 144.99,39.56 148.26,42.83 U4.7@154.648,42.83
  Bottom Layer w0.3: R75.2@146.24,4.402 cw(c146.928,4.651) R75.2@146.411,5.169 ; R75.2@146.432,4.326 146.432,5.19 v1(147.412,6.17) ccw(c148.399,5.183) R75.2@147.086,4.708 ; R75.2@146.522,4.504 cw(c147.419,4.828) 146.744,5.502 ; R75.2@146.804,4.606 cw(c147.909,5.005) 147.078,5.836 ; v1@147.262,6.17 cw(c146.9,6.17) 147.156,5.914 cw(c147.412,5.658) v1@147.412,6.02
IN_SIG19: R76.2 U4.9 | length 39.1
  Top Layer w0.3: v1@147.294,17.22 ccw(c146.932,17.22) 147.188,17.476 ccw(c147.444,17.732) v1@147.444,17.37 ; v1(147.444,17.22) 146.69,17.974 146.69,22.83 145.59,23.93 145.59,39.31 147.81,41.53 U4.9@154.648,41.53
  Bottom Layer w0.3: R76.2@146.345,15.503 cw(c147.837,15.503) 146.782,16.558 ; R76.2@146.464,15.376 146.464,16.24 v1(147.444,17.22) ; R76.2@146.645,15.503 cw(c148.861,15.503) v1@147.294,17.07 ; v1@147.294,17.22 cw(c146.932,17.22) 147.188,16.964 cw(c147.444,16.708) v1@147.444,17.07
IN_SIG20: R77.2 U4.11 | length 52
  Top Layer w0.3: U4.11@154.648,40.235 150.465,40.235 148.68,38.45 148.68,23.43 148.38,23.13 148.38,9.47 151.68,6.17 v1(155.927,6.17) ; v1@155.821,6.064 ccw(c155.565,5.808) 155.565,6.17 ccw(c155.565,6.532) v1@155.821,6.276
  Bottom Layer w0.3: R77.2@154.837,4.524 cw(c155.766,4.677) 155.1,5.343 ; R77.2@154.947,4.326 154.947,5.19 v1(155.927,6.17) ccw(c157.186,4.911) R77.2@155.429,4.622 ; R77.2@155.133,4.573 cw(c156.476,4.794) 155.513,5.757 ; v1@155.777,6.17 cw(c155.415,6.17) 155.671,5.914 cw(c155.927,5.658) v1@155.927,6.02
IN_SIG21: R78.2 U4.18 | length 36.6
  Top Layer w0.3: v1(155.953,17.22) 158.28,17.22 159.9,18.84 159.9,35.31 162.396,37.806 162.396,39.524 161.685,40.235 U4.18@160.592,40.235 ; v1@156.059,17.114 cw(c156.315,16.858) 156.315,17.22 cw(c156.315,17.582) v1@156.059,17.326
  Bottom Layer w0.3: R78.2@154.655,15.502 cw(c155.643,15.512) 154.944,16.211 ; R78.2@154.737,15.987 ccw(c154.72,16.24) 154.973,16.24 ; R78.2@154.955,15.505 cw(c156.641,15.523) 155.449,16.715 ; R78.2@154.973,15.376 154.973,16.24 ; 154.973,16.183 ccw(c155.45,16.183) R78.2@155.113,15.846 ; R78.2@155.255,15.508 cw(c157.639,15.534) 155.953,17.22 154.973,16.24 ; v1@155.803,17.22 cw(c155.441,17.22) 155.697,16.964 cw(c155.953,16.708) v1@155.953,17.07
IN_SIG22: R79.2 U4.20 | length 47.4
  Top Layer w0.3: U4.20@160.592,41.535 161.835,41.535 163,40.37 163,37.56 160.5,35.06 160.5,9.15 163.48,6.17 v1(164.441,6.17) ; v1@164.335,6.064 ccw(c164.079,5.808) 164.079,6.17 ccw(c164.079,6.532) v1@164.335,6.276
  Bottom Layer w0.3: R79.2@163.185,4.541 cw(c164.052,4.555) R79.2@163.439,5.167 ; R79.2@163.461,4.326 163.461,5.19 v1(164.441,6.17) ccw(c166.026,4.585) R79.2@163.785,4.55 ; R79.2@163.485,4.546 cw(c165.039,4.57) 163.94,5.669 ; v1@164.291,6.17 cw(c163.929,6.17) 164.185,5.914 cw(c164.441,5.658) v1@164.441,6.02
IN_SIG23: R80.2 U4.22 | length 36.7
  Top Layer w0.3: U4.22@160.592,42.835 162.155,42.835 163.6,41.39 163.6,17.63 164.01,17.22 v1(164.463,17.22) ; v1@164.357,17.114 ccw(c164.101,16.858) 164.101,17.22 ccw(c164.101,17.582) v1@164.357,17.326
  Bottom Layer w0.3: R80.2@163.266,15.492 cw(c164.292,15.591) 163.563,16.32 ; R80.2@163.272,15.976 ccw(c163.212,16.24) 163.483,16.24 ; R80.2@163.483,15.376 163.483,16.24 ; R80.2@163.564,15.521 cw(c165.113,15.67) 164.013,16.77 ; R80.2@163.659,15.9 cw(c163.899,16.24) 163.483,16.24 ; R80.2@163.863,15.549 cw(c165.934,15.749) v1(164.463,17.22) 163.483,16.24 ; v1@164.313,17.22 cw(c163.951,17.22) 164.207,16.964 cw(c164.463,16.708) v1@164.463,17.07
IN_SIG24: R97.2 U6.3 | length 56.5
  Top Layer w0.3: U6.3@168.308,45.46 166.38,45.46 164.2,43.28 164.2,24.19 164.75,23.64 168.23,23.64 169.54,22.33 169.54,7.24 170.61,6.17 v1(172.956,6.17) ; v1@172.85,6.064 ccw(c172.594,5.808) 172.594,6.17 ccw(c172.594,6.532) v1@172.85,6.276
  Bottom Layer w0.3: R97.2@171.928,4.518 cw(c172.856,4.725) 172.184,5.398 ; R97.2@171.976,4.326 171.976,5.19 v1(172.956,6.17) ccw(c174.119,5.006) R97.2@172.513,4.648 ; R97.2@172.221,4.583 cw(c173.488,4.866) 172.57,5.784 ; v1@172.806,6.17 cw(c172.444,6.17) 172.7,5.914 cw(c172.956,5.658) v1@172.956,6.02
IN_SIG25: R98.2 U6.5 | length 44.4
  Top Layer w0.3: U6.5@168.308,44.155 166.495,44.155 164.8,42.46 164.8,36.47 166.04,35.23 170.85,35.23 171.51,34.57 171.51,17.94 172.23,17.22 v1(172.972,17.22) ; v1@172.866,17.114 ccw(c172.61,16.858) 172.61,17.22 ccw(c172.61,17.582) v1@172.866,17.326
  Bottom Layer w0.3: R98.2@171.765,15.493 cw(c172.79,15.583) 172.063,16.311 ; R98.2@171.779,15.977 ccw(c171.724,16.24) 171.992,16.24 ; R98.2@171.992,15.376 171.992,16.24 ; R98.2@172.064,15.519 cw(c173.626,15.657) 172.517,16.765 ; R98.2@172.167,15.894 cw(c172.422,16.24) 171.992,16.24 ; R98.2@172.363,15.546 cw(c174.461,15.731) v1(172.972,17.22) 171.992,16.24 ; v1@172.822,17.22 cw(c172.46,17.22) 172.716,16.964 cw(c172.972,16.708) v1@172.972,17.07
IN_SIG26: R99.2 U6.7 | length 57.4
  Top Layer w0.3: U6.7@168.308,42.855 166.645,42.855 165.4,41.61 165.4,36.72 166.29,35.83 171.1,35.83 172.11,34.82 172.11,26.79 176.07,22.83 176.07,8.46 178.36,6.17 v1(181.471,6.17) ; v1@181.365,6.064 ccw(c181.109,5.808) 181.109,6.17 ccw(c181.109,6.532) v1@181.365,6.276
  Bottom Layer w0.3: R99.2@180.417,4.521 cw(c181.347,4.706) 180.677,5.376 ; R99.2@180.491,4.326 180.491,5.19 v1(181.471,6.17) ccw(c182.672,4.969) R99.2@181.006,4.638 ; R99.2@180.711,4.579 cw(c182.01,4.837) 181.074,5.773 ; v1@181.321,6.17 cw(c180.959,6.17) 181.215,5.914 cw(c181.471,5.658) v1@181.471,6.02
IN_SIG27: R100.2 U6.9 | length 45.1
  Top Layer w0.3: U6.9@168.41,41.58 166.78,41.58 166,40.8 166,36.97 166.54,36.43 171.35,36.43 172.71,35.07 172.71,27.42 176.671,23.459 176.671,19.919 179.37,17.22 v1(181.481,17.22) ; v1@181.375,17.114 ccw(c181.119,16.858) 181.119,17.22 ccw(c181.119,17.582) v1@181.375,17.326
  Bottom Layer w0.3: R100.2@180.311,15.945 ccw(c180.178,16.24) 180.501,16.24 ; R100.2@180.397,15.481 cw(c181.426,15.682) 180.685,16.423 ; R100.2@180.501,15.376 180.501,16.24 ; R100.2@180.692,15.539 cw(c182.092,15.813) 181.083,16.822 ; R100.2@180.695,15.952 cw(c180.813,16.24) 180.501,16.24 ; R100.2@180.986,15.596 cw(c182.758,15.943) v1(181.481,17.22) 180.501,16.24 ; v1@181.331,17.22 cw(c180.969,17.22) 181.225,16.964 cw(c181.481,16.708) v1@181.481,17.07
IN_SIG28: R101.2 U6.11 | length 59.2
  Top Layer w0.3: U6.11@168.308,40.265 168.303,40.26 166.96,40.26 166.61,39.91 166.61,37.22 166.8,37.03 171.61,37.03 173.31,35.33 173.31,27.668 177.37,23.609 177.37,20.07 178.09,19.35 182.2,19.35 184.56,16.99 184.56,9.28 187.67,6.17 v1(189.985,6.17) ; v1@189.879,6.064 ccw(c189.623,5.808) 189.623,6.17 ccw(c189.623,6.532) v1@189.879,6.276
  Bottom Layer w0.3: R101.2@188.999,4.514 cw(c189.922,4.757) 189.247,5.431 ; R101.2@189.005,4.326 189.005,5.19 v1(189.985,6.17) ccw(c191.091,5.065) R101.2@189.579,4.667 ; R101.2@189.289,4.59 cw(c190.506,4.911) 189.616,5.801 ; v1@189.835,6.17 cw(c189.473,6.17) 189.729,5.914 cw(c189.985,5.658) v1@189.985,6.02
IN_SIG29: R102.2 U6.18 | length 44
  Top Layer w0.3: U6.18@174.252,40.265 175.435,40.265 175.89,39.81 175.89,26.08 178.05,23.92 181.65,23.92 183.45,22.12 183.45,19.54 185.77,17.22 v1(189.991,17.22) ; v1@189.885,17.114 ccw(c189.629,16.858) 189.629,17.22 ccw(c189.629,17.582) v1@189.885,17.326
  Bottom Layer w0.3: R102.2@188.711,15.39 cw(c189.442,15.597) R102.2@188.905,16.134 ; R102.2@188.834,15.901 ccw(c188.599,16.24) 189.011,16.24 ; R102.2@188.999,15.472 cw(c190.007,15.756) 189.267,16.496 ; R102.2@189.011,15.376 189.011,16.24 ; R102.2@189.221,15.975 cw(c189.283,16.24) 189.011,16.24 ; R102.2@189.288,15.553 cw(c190.572,15.915) 189.629,16.858 ; R102.2@189.577,15.635 cw(c191.136,16.074) v1(189.991,17.22) 189.011,16.24 ; v1@189.841,17.22 cw(c189.479,17.22) 189.735,16.964 cw(c189.991,16.708) v1@189.991,17.07
IN_SIG30: R103.2 U6.20 | length 61.4
  Top Layer w0.3: U6.20@174.252,41.565 174.257,41.56 175.58,41.56 176.58,40.56 176.58,26.46 178.41,24.63 181.99,24.63 184.05,22.57 184.05,19.789 185.699,18.14 190.5,18.14 191.15,17.49 191.15,9.12 196.19,4.08 v1(199.39,4.08) ; v1@199.284,3.974 ccw(c199.028,3.718) 199.028,4.08 ccw(c199.028,4.442) v1@199.284,4.186
  Bottom Layer w0.3: R103.2@197.4,4.21 197.53,4.08 v1(199.39,4.08) cw(c199.39,5.951) R103.2@198.064,4.631 ; R103.2@197.851,4.42 ccw(c198.668,5.233) 198.668,4.08 ; R103.2@198.063,3.946 cw(c198.386,3.623) 198.386,4.08 ; v1@199.284,3.974 ccw(c199.028,3.718) 199.028,4.08 ccw(c199.028,4.442) v1@199.284,4.186
IN_SIG31: R104.2 U6.22 | length 50.4
  Top Layer w0.3: U6.22@174.252,42.865 174.257,42.87 175.56,42.87 177.18,41.25 177.18,26.709 178.659,25.23 182.39,25.23 184.65,22.97 184.65,20.96 185.55,20.06 190.299,20.06 192.56,17.799 v1(192.56,13.59) ; v1@192.454,13.696 ccw(c192.198,13.952) 192.56,13.952 ccw(c192.922,13.952) v1@192.666,13.696
  Bottom Layer w0.3: v1@192.454,13.484 cw(c192.198,13.228) 192.56,13.228 cw(c192.922,13.228) v1@192.666,13.484 ; 192.56,12.541 ccw(c193.674,12.541) R104.2@193.109,11.581 ; 192.56,13.065 ccw(c193.982,13.065) R104.2@193.261,11.839 ; R104.2@193.294,11.68 192.56,12.414 v1(192.56,13.59) ccw(c194.291,13.59) R104.2@193.413,12.098
INPUT_CLK: U1.12 U3.25 U4.25 U5.25 U6.25 | length 125.3
  Top Layer w0.3: U1.12@85.17,36.575 v1(87.46,36.575) ; U1.12@86.126,36.469 cw(c86.382,36.213) 86.382,36.575 cw(c86.382,36.937) U1.12@86.126,36.681 ; v1@87.354,36.469 ccw(c87.098,36.213) 87.098,36.575 ccw(c87.098,36.937) v1@87.354,36.681 ; v1(91.17,39.95) 91.74,40.52 91.74,44.26 96.67,49.19 105.28,49.19 106.52,47.95 106.52,46.52 106.177,46.177 105.337,46.177 ; v1@91.17,40.1 ccw(c91.17,40.462) 91.426,40.206 ccw(c91.682,39.95) v1@91.32,39.95 ; U3.25@103.702,45.655 104.815,45.655 105.337,46.177 ; v1@105.545,46.08 ccw(c105.337,45.903) 105.337,46.177 ; v1@105.545,46.274 cw(c105.337,46.45) 105.337,46.177 ; v1@105.766,46.071 cw(c106.022,45.815) 106.022,46.177 cw(c106.022,46.539) v1@105.766,46.283 ; U5.25@117.442,45.655 118.625,45.655 119.09,46.12 ; v1@119.262,46.234 cw(c119.09,46.306) 119.09,46.12 ; v1(119.4,46.177) 119.343,46.12 119.09,46.12 ; U4.25@160.592,44.785 161.827,44.785 162.042,45 v1(163.09,45) ; v1@162.984,44.894 ccw(c162.728,44.638) 162.728,45 ccw(c162.728,45.362) v1@162.984,45.106 ; U6.25@174.252,44.815 176.005,44.815 176.53,45.34 v1@176.82,45.34
  MidLayer2 w0.254: v1(119.4,46.177) 120.337,46.177 121.676,47.516 159.654,47.516 162.17,45 v1(163.09,45) ; v1@119.522,46.054 cw(c119.818,45.759) 119.818,46.177 cw(c119.818,46.594) v1@119.522,46.299 ; v1@162.968,44.878 ccw(c162.672,44.582) 162.672,45 ccw(c162.672,45.418) v1@162.968,45.122
  Bottom Layer w0.3: v1(87.46,36.575) 89.225,36.575 91.17,38.52 v1(91.17,39.95) ; v1@87.566,36.469 cw(c87.822,36.213) 87.822,36.575 cw(c87.822,36.937) v1@87.566,36.681 ; v1@91.064,39.844 cw(c90.808,39.588) 91.17,39.588 cw(c91.532,39.588) v1@91.276,39.844 ; v1(105.66,46.177) 106.187,46.177 107.14,47.13 117.82,47.13 118.773,46.177 v1(119.4,46.177) ; v1@105.766,46.071 cw(c106.022,45.815) 106.022,46.177 cw(c106.022,46.539) v1@105.766,46.283 ; v1@119.294,46.071 ccw(c119.038,45.815) 119.038,46.177 ccw(c119.038,46.539) v1@119.294,46.283 ; v1(163.09,45) 163.83,45 165.7,46.87 173.69,46.87 175.223,45.337 v1@176.82,45.337 ; v1@163.196,44.894 cw(c163.452,44.638) 163.452,45 cw(c163.452,45.362) v1@163.196,45.106 ; 176.385,45.337 cw(c176.385,44.872) v1@176.714,45.201
  other v1: 176.82,45.307
INPUT_CSN: U1.13 U3.24 U4.24 U5.24 U6.24 | length 125
  Top Layer w0.3: U1.13@85.17,37.845 85.175,37.84 v1(87.46,37.84) ; U1.13@86.126,37.739 cw(c86.37,37.495) 86.37,37.84 ; U1.13@86.126,37.951 ccw(c86.394,38.219) 86.394,37.84 ; v1@87.354,37.734 ccw(c87.098,37.478) 87.098,37.84 ccw(c87.098,38.202) v1@87.354,37.946 ; v1(90,39.95) 91.13,41.08 91.13,44.51 96.41,49.79 105.533,49.79 107.12,48.203 107.12,46.17 106.263,45.313 105.443,45.313 105.135,45.005 U3.24@103.702,45.005 ; v1@90,40.1 ccw(c90,40.462) 90.256,40.206 ccw(c90.512,39.95) v1@90.15,39.95 ; v1@105.766,45.207 cw(c106.022,44.951) 106.022,45.313 cw(c106.022,45.675) v1@105.766,45.419 ; U5.24@117.442,45.005 118.896,45.005 v1@119.204,45.313 ; U4.24@160.592,44.135 162.245,44.135 v1(162.36,44.25) ; 161.72,44.135 ccw(c161.72,44.89) v1@162.254,44.356 ; U6.24@174.252,44.165 176.235,44.165 176.543,44.473 v1@176.82,44.473
  MidLayer2 w0.254: v1(119.4,45.313) 120.383,45.313 122.032,46.962 159.398,46.962 162.11,44.25 v1(162.36,44.25) ; v1@119.522,45.191 cw(c119.818,44.896) 119.818,45.313 cw(c119.818,45.731) v1@119.522,45.436
  Bottom Layer w0.3: v1(87.46,37.84) 89,37.84 90,38.84 v1(90,39.95) ; v1@87.566,37.734 cw(c87.822,37.478) 87.822,37.84 cw(c87.822,38.202) v1@87.566,37.946 ; v1@89.894,39.844 cw(c89.638,39.588) 90,39.588 cw(c90.362,39.588) v1@90.106,39.844 ; v1(105.66,45.313) 106.303,45.313 107.47,46.48 117.6,46.48 118.767,45.313 v1(119.4,45.313) ; v1@105.766,45.207 cw(c106.022,44.951) 106.022,45.313 cw(c106.022,45.675) v1@105.766,45.419 ; v1@119.294,45.207 ccw(c119.038,44.951) 119.038,45.313 ccw(c119.038,45.675) v1@119.294,45.419 ; v1(162.36,44.25) 164.04,44.25 166.06,46.27 173.441,46.27 175.281,44.43 176.78,44.43 v1@176.82,44.39 ; v1@162.466,44.144 cw(c162.722,43.888) 162.722,44.25 cw(c162.722,44.612) v1@162.466,44.356 ; 176.426,44.43 ccw(c176.426,44.838) v1@176.714,44.549 ; 176.49,44.43 cw(c176.49,44.113) v1@176.714,44.337
  other v1: 176.82,44.443